# Altium PCB bloodhound_gprs_0_alph.PcbDoc
Units mil, origin at the board's own origin, x right, y up, seen from the top; angles counter-clockwise.
Board outline 1535.43 x 1889.76 mil, 2 copper layers (Top Layer, Bottom Layer); 37 components, 31 nets, 165 pads, 24 vias.
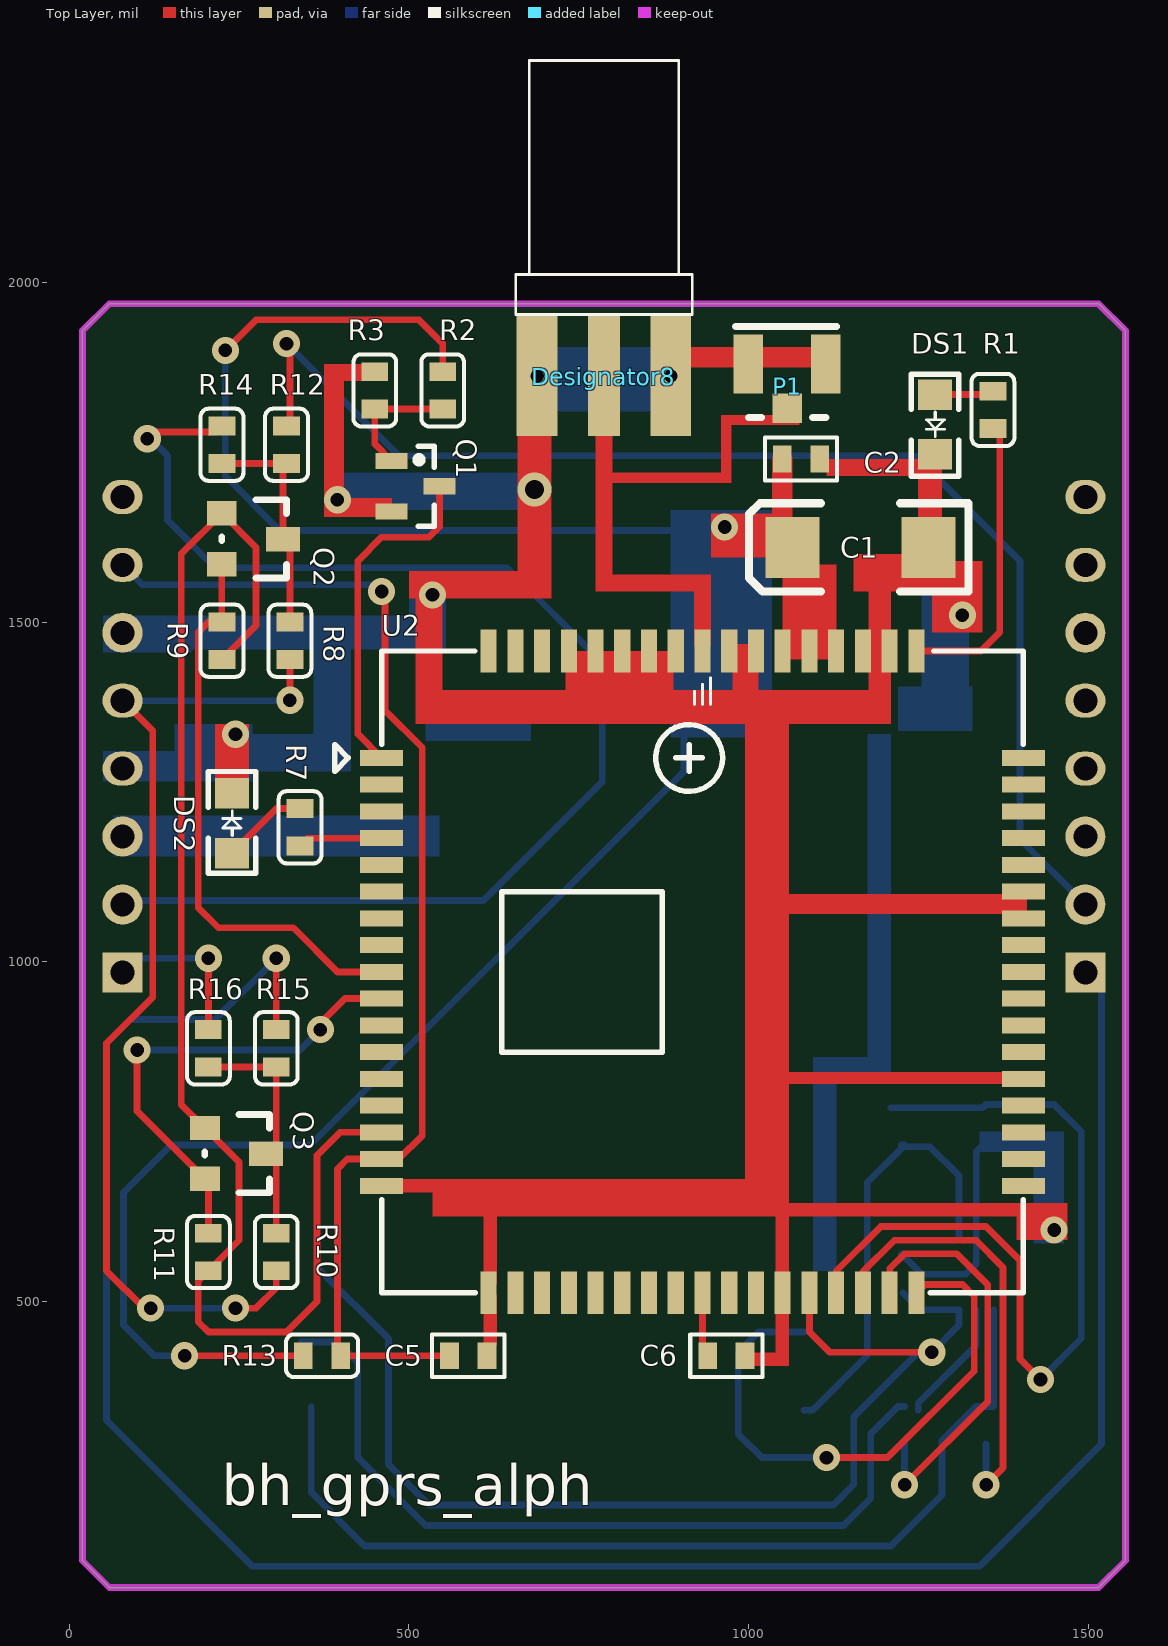
[diagram p0: Top Layer view]
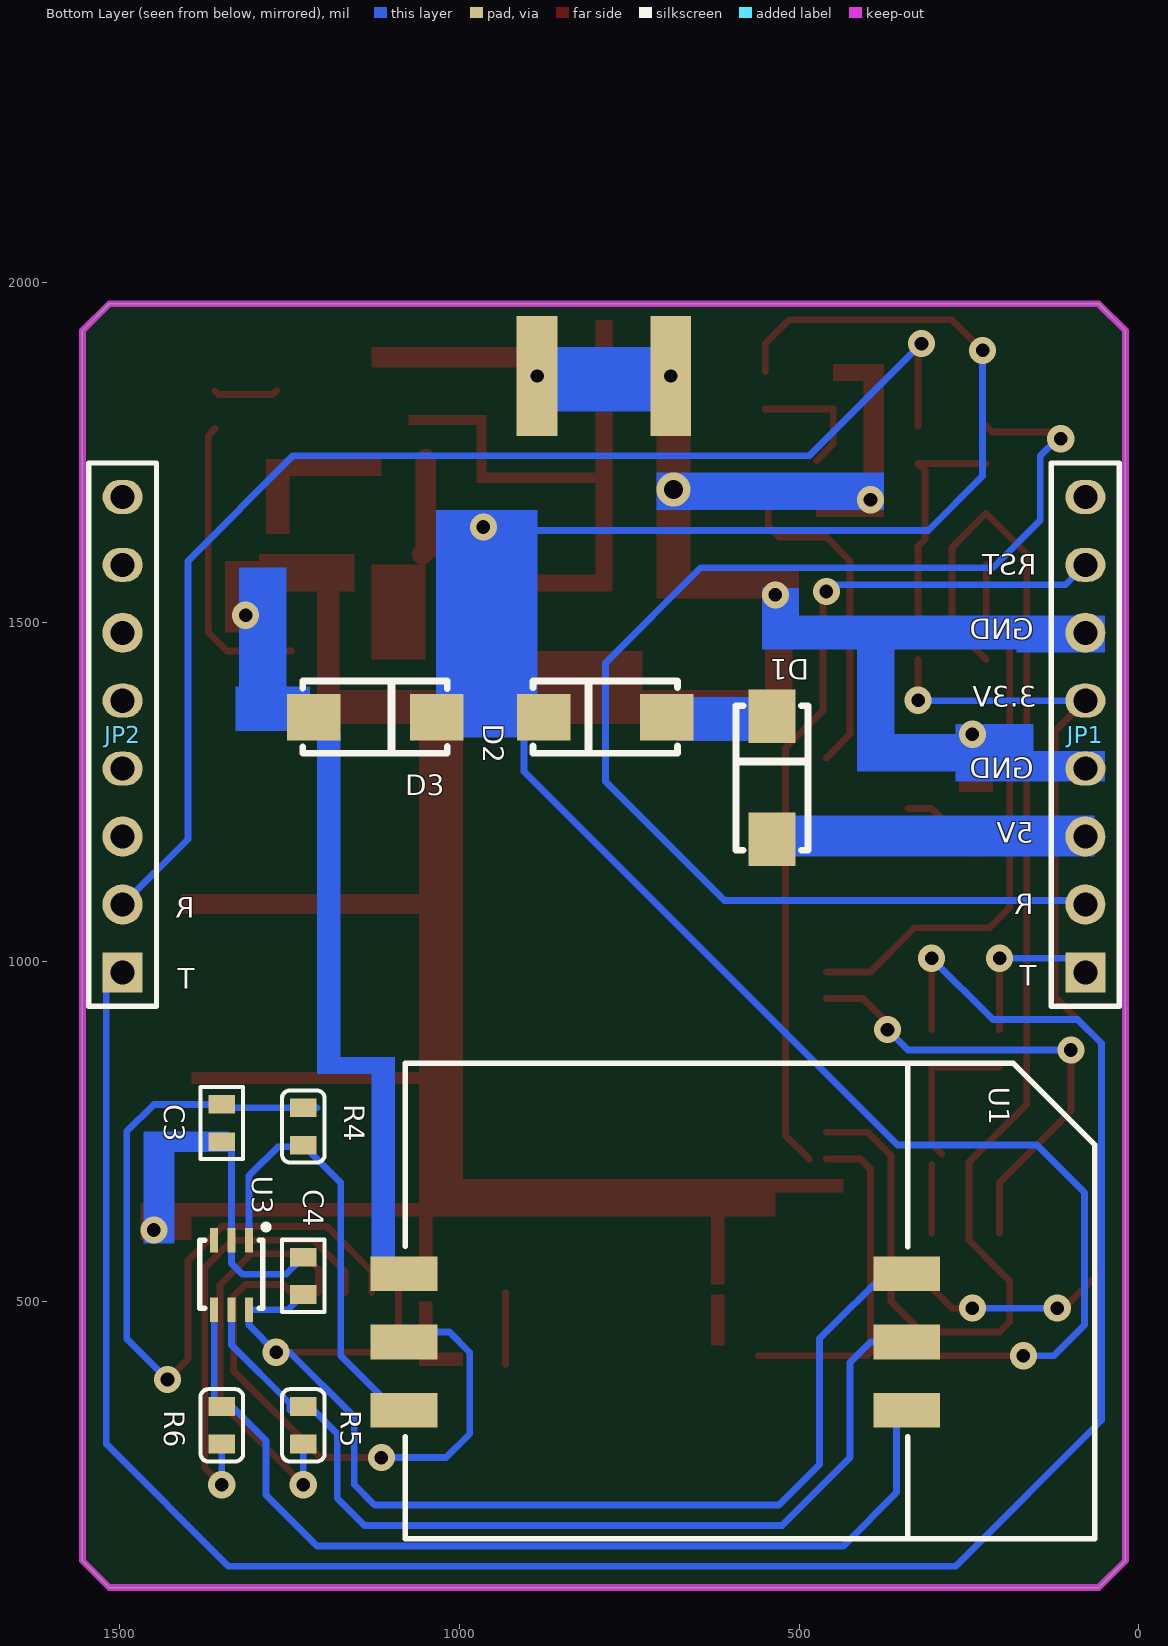
[diagram p1: Bottom Layer view, seen from below]
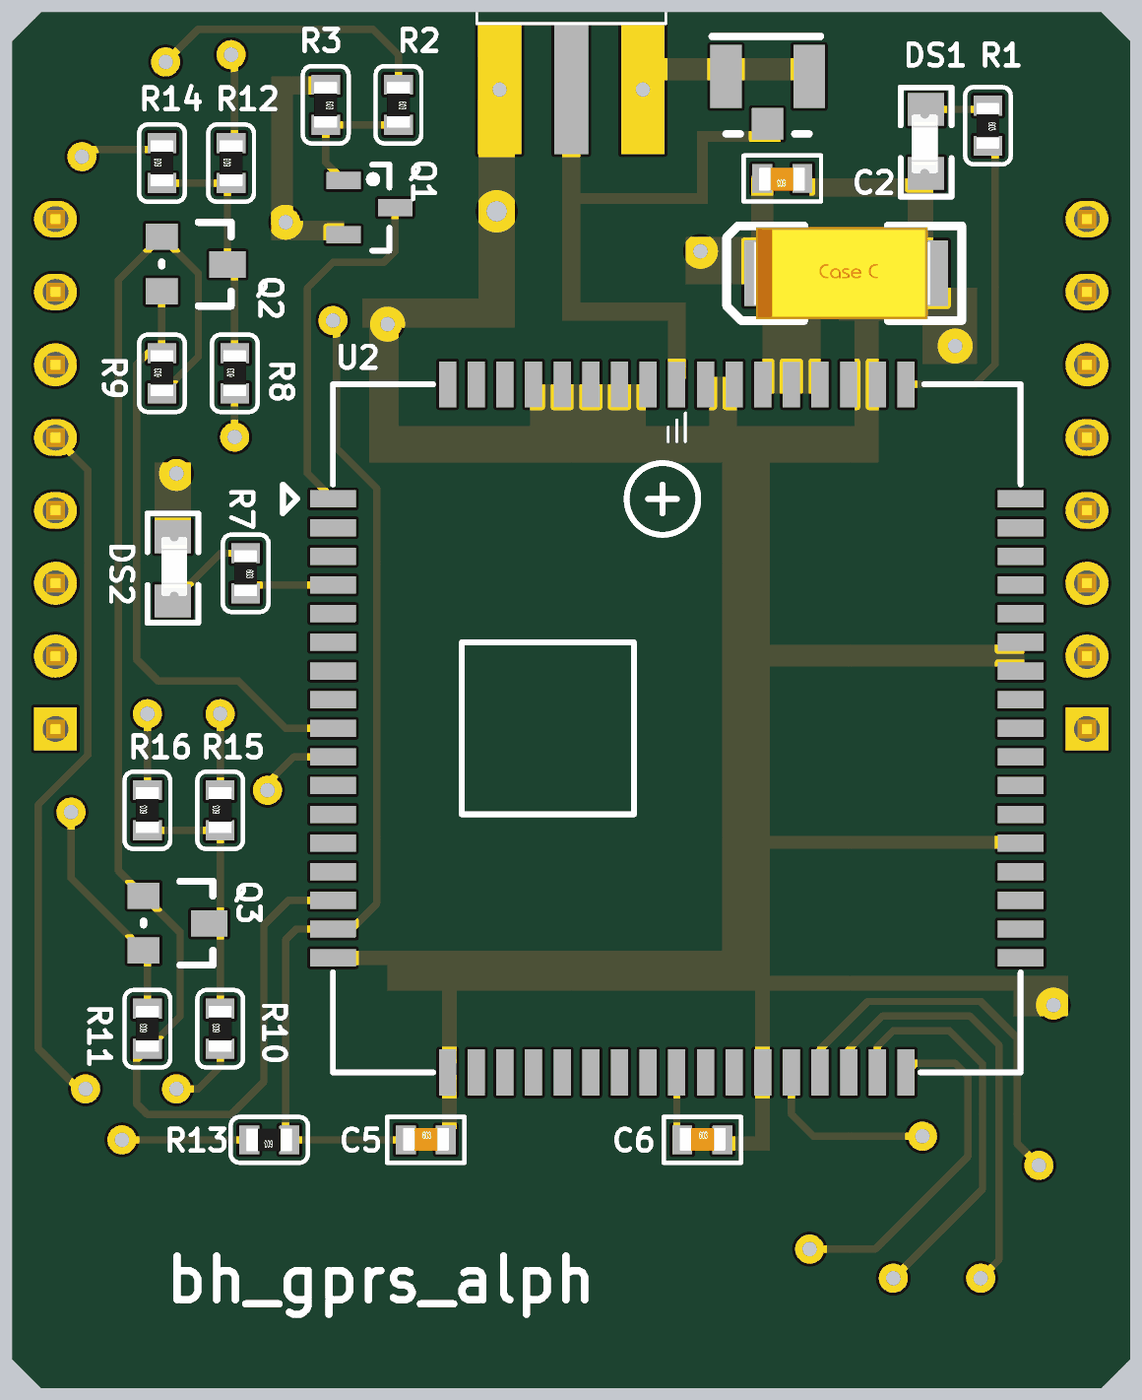
[diagram p2: 3D render of the assembled board from above, using the file's embedded part models]
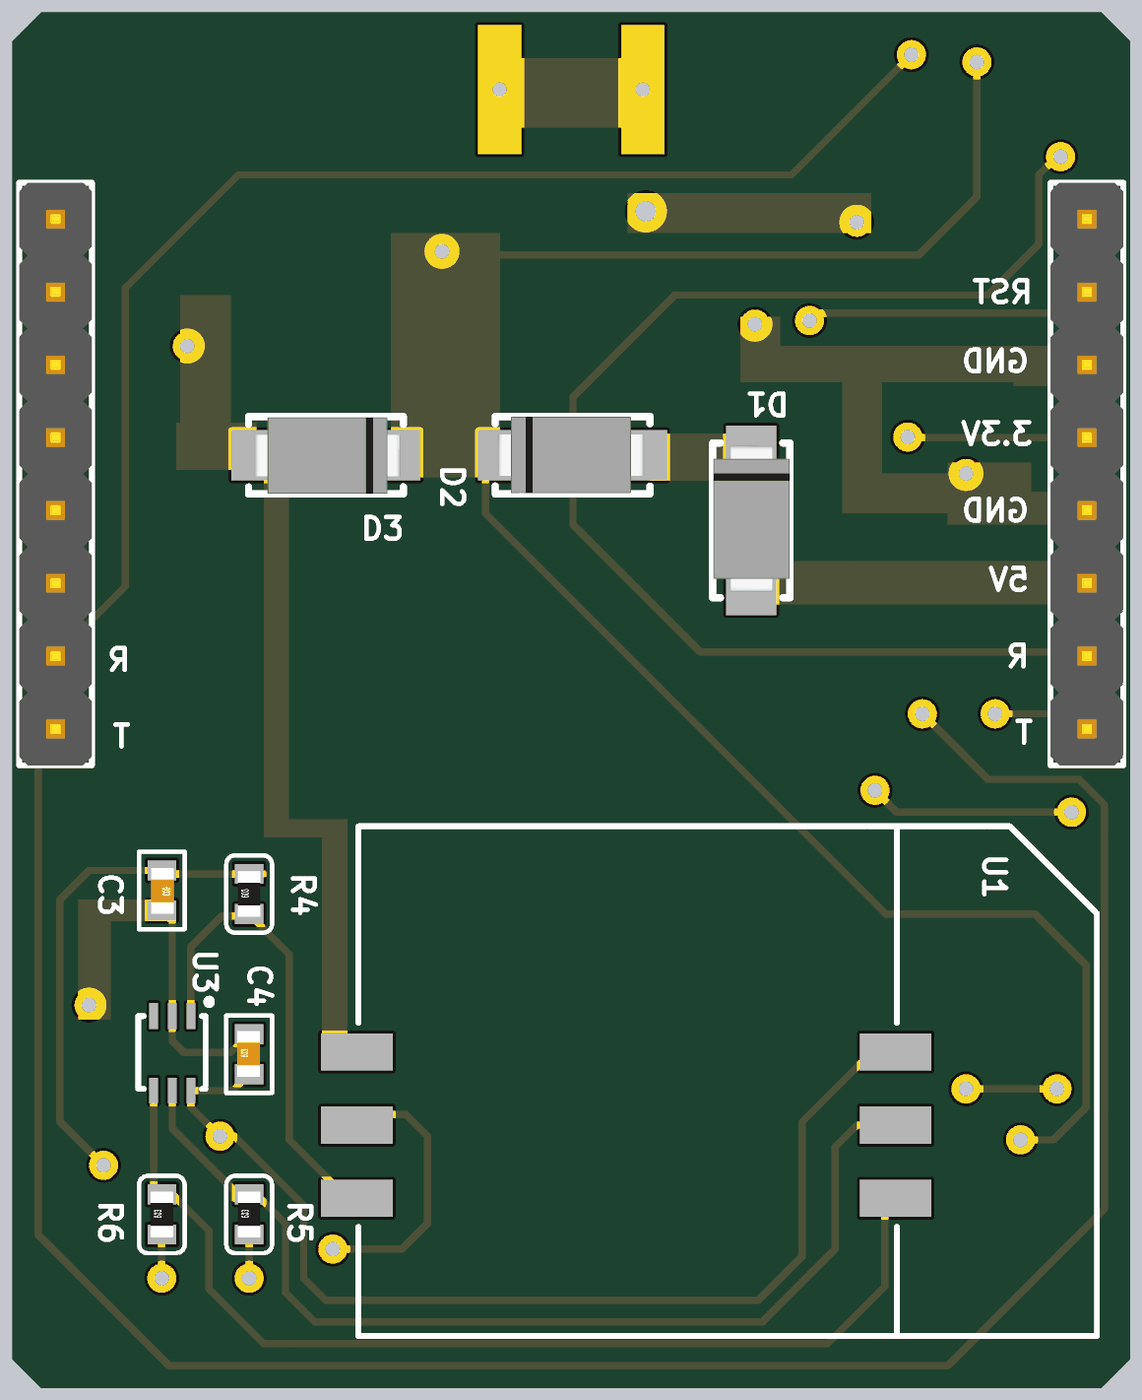
[diagram p3: 3D render of the assembled board from below, using the file's embedded part models]

## Layer stack, top to bottom
Top Layer: signal copper 1.4
Dielectric: dielectric 12.6, FR-4, Dk 4.8
Bottom Layer: signal copper 1.4

## Board outline
59.06,1968.5 1515.75,1968.5 1555.12,1929.13 1555.12,118.11 1515.75,78.74 59.06,78.74 59.05,78.74 19.68,118.11 19.68,1929.13

## Design rules (kind name [scope] priority, off if disabled: settings)
Clearance Clearance_1 [(InPolygon)] p1: gap=20
Clearance [All] p2: gap=10
MinimumSolderMaskSliver [All] p1 off: minsoldermaskwidth=10
PolygonConnect [All] p1: connectstyle=Relief reliefconductorwidth=10 reliefentries=4 polygonreliefangle="90 Angle"
RoutingVias [All] p1: holewidth=20 width=40 viastyle="Through Hole" minholewidth=15 minwidth=30 maxholewidth=28 maxwidth=50
SilkscreenOverComponentPads [All] p1 off: minsilkscreentomaskgap=10
SolderMaskExpansion [All] p1: expansion=4
Width Width_1 [InNet('GND') OR InNet('VCC') OR  InNet('VCC_5V')] p1: maxlimit=30 minlimit=10 preferedwidth=30 minimp=50.000000 maximp=50.000000 favimp=50.000000
Width [All] p2: maxlimit=30 minlimit=10 preferedwidth=10 minimp=50.000000 maximp=50.000000 favimp=50.000000
26 further rules are at their usual default settings.

## Components (designator, comment, footprint, x,y, rotation, side; value= is the part's Value field where it differs from the comment)
C1 "470uf" C6032 1065,1610 r180 top
C2 "0.1uF" C0603 1105,1740 r180 top
C3 "22PF" C0603 1349.99,790 r270 bottom
C4 "0.1uF" C0603 1230,510 r90 bottom
C5 "0.1uF" C0603 560,420 r0 top
C6 "0.1uF" C0603 940,420 r0 top
D1 "SS34" DO-214 540,1180 r90 bottom
D2 "SS34" DO-214 695,1360 r0 bottom
D3 "D-SMBJ5.0CA" DO-214 1215,1360 r180 bottom
Designator8 "Comment" SMA-2 787.4,1862.2 r270 top
DS1 "LED GREEN" D0805 1275,1835 r270 top
DS2 "LED GREEN" D0805 240,1160 r90 top
JP1 "Socket1-A" SIP1X8X2.54 78.74,984.25 r90 bottom
JP2 "Socket1B" SIP1X8X2.54 1496.06,984.25 r90 bottom
P1 "SMA-2" IPX 1000,1880 r0 top
Q1 "9013" SOT23-3L 510,1700 r0 top
Q2 "RTR020P02" TSMT3 225,1659.96 r270 top
Q3 "RTR020P02" TSMT3 200,755 r270 top
R1 "10k" R0603 1360,1840 r270 top
R2 "10k" R0603 550,1868.7 r270 top
R3 "10k" R0603 450,1868.7 r270 top
R4 "22" R0603 1230,730 r90 bottom
R5 "22" R0603 1230,290 r90 bottom
R6 "22" R0603 1350,290 r90 bottom
R7 "1k" R0603 340,1225.46 r270 top
R8 "1k" R0603 325,1445 r90 top
R9 "1k" R0603 225,1445 r90 top
R10 "1k" R0603 305,545 r90 top
R11 "1k" R0603 205,545 r90 top
R12 "0" R0603 320,1733.58 r90 top
R13 "10k" R0603 400,420 r180 top
R14 "0" R0603 225,1733.58 r90 top
R15 "0" R0603 305,845 r90 top
R16 "0" R0603 205,845 r90 top
U1 "SIM" SIM 440,540.63 r90 bottom
U2 "SIM900" GSM_900A 460,1300 r0 top
U3 "SMF05C" SOT-363 1310,590 r270 bottom

## Footprints (in the part's own frame and the unit in brackets; to place one, negate y for a bottom-side part, rotate by r counter-clockwise, add the part's x,y. Pads: shape width x height; smd on the part's side, far side on the other; paste and mask are expansions set on the pad)
C0603 [mm]
  rect 0.7x1 smd: 1(0,0) 2(1.4,0)
  silkscreen extent -0.65,-0.8 2.05,0.8, body extent -0.09,-0.38 1.51,0.42, height 0.3
C6032 [mil]
  rect 79.92x90 smd: 1(0,0) 2(-200,0)
  silkscreen extent -259,-65 64,65, body extent -216,-63 27,63, height 107
D0805 [mil]
  rect 45x50 smd: A(0,0) K(88,0)
  silkscreen extent -30,-35 120,35, body extent 7,-20 88,16, height 33
DO-214 [mm]
  rect 2x1.75 smd: 1(0,0) 2(4.6,0)
  silkscreen extent -0.4,-1.35 5,1.35, body extent -0.2,-1.34 4.91,1.33, height 2.12
GSM_900A [mm]
  rect 1.6x0.6 smd: 1(0,0) 2(0,-1) 3(0,-2) 4(0,-3) 5(0,-4) 6(0,-5) 7(0,-6) 8(0,-7) 9(0,-8) 10(0,-9) 11(0,-10) 12(0,-11) 13(0,-12) 14(0,-13) 15(0,-14) 16(0,-15) 17(0,-16) 35(24,-16) 36(24,-15) 37(24,-14) 38(24,-13) 39(24,-12) 40(24,-11) 41(24,-10) 42(24,-9) 43(24,-8) 44(24,-7) 45(24,-6) 46(24,-5) 47(24,-4) 48(24,-3) 49(24,-2) 50(24,-1) 51(24,0)
  rect 0.6x1.6 smd: 18(4,-20) 19(5,-20) 20(6,-20) 21(7,-20) 22(8,-20) 23(9,-20) 24(10,-20) 25(11,-20) 26(12,-20) 27(13,-20) 28(14,-20) 29(15,-20) 30(16,-20) 31(17,-20) 32(18,-20) 33(19,-20) 34(20,-20) 52(20,4) 53(19,4) 54(18,4) 55(17,4) 56(16,4) 57(15,4) 58(14,4) 59(13,4) 60(12,4) 61(11,4) 62(10,4) 63(9,4) 64(8,4) 65(7,4) 66(6,4) 67(5,4) 68(4,4)
  silkscreen extent -1.75,-20 24,4
IPX [mm]
  rect 1.1x1.1 smd: 1(1.45,-1.65)
  rect 1.1x2.2 smd: 2(0,0) 2(2.9,0)
  silkscreen extent -0.48,-2 3.3,1.4
R0603 [mm]
  rect 0.7x1 smd: 1(0,0) 2(1.4,0)
  silkscreen extent -0.65,-0.8 2.05,0.8, body extent -0.1,-0.4 1.5,0.4, height 0.3
SIM [mm]
  rect 1.3x2.5 smd: 1(0,-2.5) 2(-2.55,-2.5) 3(-5.1,-2.5) 4(0,16.306) 5(-2.55,16.306) 6(-5.1,16.306)
  silkscreen extent -9.91,-9.53 7.87,16.25
SIP1X8X2.54 [mm] "Connector; Header; 8 Position"
  rect 1.5x1.5 hole 0.9: 1(0,0)
  round 1.5 hole 0.9: 2(2.54,0) 3(5.08,0) 6(12.7,0)
  oval 1.27x1.5 hole 0.9: 4(7.62,0) 5(10.16,0) 7(15.24,0) 8(17.78,0)
  silkscreen extent -1.27,-1.27 19.05,1.27, body extent -1.27,-1.27 19.05,1.27, height 0.7
SMA-2 [mm]
  rect 4.5x1.2 smd: 1(0,0)
  rect 4.5x1.524 hole 0.5: 2(0,2.5) 2(0,-2.5)
  silkscreen extent -11.8,-3.3 -2.3,3.3
SOT23-3L [mm] "SOT23, 3-Leads, Body 2.9x1.3mm, Pitch 0.95mm, Lead Span 2.5mm, IPC High Density"
  rect 1.2x0.6 smd: 1(-0.9,0.95) 2(-0.9,-0.95) 3(0.9,0)
  silkscreen extent 0,-1.5 0.7,1.5, body extent -0.7,-1.5 0.7,1.5, height 1.1
SOT-363 [mm]
  rect 0.9x0.3 smd: 1(0,0) 2(0,-0.65) 3(0,-1.3) 4(2.6,-1.3) 5(2.6,-0.65) 6(2.6,0)
  silkscreen extent -0.51,-1.84 2.54,0.64
TSMT3 [mil]
  rect 36x44 smd: 1(-0.24,-0.24) 2(74.76,-0.24)
  rect 36x50 smd: 3(38,90)
  silkscreen extent -20,0 95,95, body extent -24,15 99,69, height 43

## Part data
C1: library part CAP-T, "钽电容"
C2 C3 C4 C5 C6: library part CAP-SMD, "SMD-CAP"
D1 D2: library part DIODE, "Diode"
D3 U3: "TVS"
DS1 DS2: library part LED
JP1 JP2: library part SIP1X8, "2.0排针"
P1: library part BNC, "IPX"
Q1: library part NPN, "NPN Transistor"
Q2 Q3: library part "MOSFET P", "P MOSFET"
R1 R2 R3 R4 R5 R6 R7 R8 R9 R10 R11 R12 R13 R14 R15 R16: library part RES, "Resistor"
U1: "手机SIM卡"

## Via types
v1: diameter 40, hole 20, Top Layer to Bottom Layer, 23 vias
v2: diameter 50, hole 28, Top Layer to Bottom Layer, 1 vias

## Nets (pads, with @x,y where several pads share a name; then routed paths per layer and width w, separated by ;. In a path a pad name is that pad's centre, name@x,y a point inside that pad or via, vN(x,y) a via of type N, cw(c..) or ccw(c..) an arc to the next point about the centre after c; other vN are vias at no path point)
EX_RXD3: JP1.2 R14.2 | length 1966.4
  Top Layer w10: v1@110,1780 216.3,1780 R14.2
  Bottom Layer w10: JP1.2@92.99,1070 JP1.2 84.49,1090 610,1090 785,1265 785,1440 645,1580 215,1580 145,1650 145,1745 v1@110,1780
  other v1: 115,1770
EX_TXD3: JP1.1 R16.2 | length 249.6
  Top Layer w10: R16.2@205,910 R16.2 v1(205,1005)
  Bottom Layer w10: JP1.1 99.49,1005 v1(205,1005)
GND: C1.2 C2.1 C3.2 C4.2 C5.2 C6.2 D3.1 Designator8.2 DS1.K DS2.K JP1.4 JP1.6 P1.2 Q1.2 R3.1 U1.4 U2.17 U2.18 U2.29 U2.39 U2.45 U2.46 U2.53 U2.54 U2.58 U2.59 U2.61 U2.62 U2.63 U2.64 U2.65 U3.2 | length 329.1
  Top Layer w30: Designator8.2@887.4,1889.76 Designator8.2@897.64,1900
  Bottom Layer w10: C4.2@1225.12,570 C4.2 1255.12,540 1320,540 1335.59,555.59 U3.2 1335.59,720.47 C3.2
  other v1: 1450,605 245,1335 1315,1510 535,1540 395,1680
  other v2: 685,1695
NetC6_1: C6.1 U2.26 | length 105
  Top Layer w10: C6.1@932.44,407.56 U2.26
NetD1_2: D1.2 D2.1
NetDS1_A: DS1.A R1.1 | length 94.8
  Top Layer w10: DS1.A@1269.54,1840.46 DS1.A 1355,1835 R1.1
NetDS2_A: DS2.A R7.1 | length 127.1
  Top Layer w10: DS2.A 305.46,1225.46 R7.1
NetP1_2: Designator8.1 P1.1 U2.60
NetQ1_B: Q1.1 R2.2 R3.2 | length 187.1
  Top Layer w10: Q1.1 450,1761.97 R3.2 R2.2 R2.2@550,1812.83
NetQ2_2: Q2.2 R9.2 U2.9 | length 840.4
  Top Layer w10: Q2.2 224.76,1500.35 205.35,1500.35 190,1485 190,1080 220,1050 330.04,1050 395,985.04 420,985.04 419.96,985 U2.9 U2.9
NetQ3_2: Q3.2 R11.2 U2.10 | length 722
  Top Layer w10: v1(100,870) 100,860 95,855 100,850 100,780 Q3.2 205,675 R11.2 ; v1@370,909.58 406.09,945.67 U2.10
  Bottom Layer w10: v1@95,855 100,860 v1(100,870) 340,870 v1(370,900)
NetR1_2: R1.2 U2.52 | length 438
  Top Layer w10: U2.52 1342.48,1457.48 1370,1485 1370,1774.88 R1.2
NetR4_1: R4.1 U1.6 U3.1 | length 662.7
  Bottom Layer w10: U1.6 1094.84,339.84 1175,420 1175,675 R4.1@1227.5,727.5 ; U3.1 1310,685 1267.5,727.5 R4.1@1227.5,727.5 ; R4.1@1227.5,727.5 R4.1 1225,730 R4.1@1227.5,727.5
NetR5_2: R5.2 U1.2 U3.5 | length 1393.6
  Bottom Layer w10: U1.2 394.76,440.24 425,410 425,270 525,170 1140,170 1180,210 1180,305 1220.12,345.12 R5.2 ; 1250,340 1250,350 1335.59,435.59 U3.5
NetR6_2: R6.2 U1.3 U3.4 | length 1437.3
  Bottom Layer w10: U1.3@356.57,345 356.57,218.43 435,140 1210,140 1285,215 1285,295 1335.12,345.12 R6.2 1360,345.12 1361.18,346.3 U3.4
NetR7_2: R7.2 U2.4 | length 127.6
  Top Layer w10: R7.2 351.55,1181.89 U2.4 U2.4@457.99,1179.88
PWRKEY: Q1.3 U2.1 | length 505.4
  Top Layer w10: U2.1 425,1335 425,1590 460,1625 530,1625 545.43,1640.43 Q1.3
RXD0: JP2.2 R12.2 | length 1878.5
  Top Layer w10: R12.2@325,1788.7 v1@325,1895
  Bottom Layer w10: v1@330,1900 v1(320,1910) 485,1745 1245,1745 1400,1590 1400,1180.31 JP2.2
SIM900_RST: C5.1 JP1.7 R13.1 U2.16 | length 1806.3
  Top Layer w10: U2.16 409.45,709.45 395,695 395,425 R13.1 C5.1 ; v1(460,1545) 460,1555 465,1550 465,1370 520,1315 520,744.3 U2.16@485.15,709.45
  Bottom Layer w10: JP1.7 107.99,1555 460,1555 v1(460,1545)
SIM_CLK: R6.1 U2.32 | length 663.5
  Top Layer w10: U2.32 1168.66,543.66 1215,590 1335,590 1375,550 1375,255 v1(1350,230)
  Bottom Layer w10: v1(1350,230) R6.1
SIM_DATA: C3.1 R4.2 U2.31 | length 1226.2
  Top Layer w10: U2.31 1129.29,544.29 1195,610 1350,610 1400,560 1400,415 v1(1430,385)
  Bottom Layer w10: 1210,785.12 R4.2 1345.11,785.12 C3.1 1450,790 1490,750 1490,445 v1(1430,385)
SIM_RST: R5.1 U2.33 | length 613
  Top Layer w10: U2.33 1208.03,548.03 1230,570 1306.85,570 1352.5,524.35 1352.5,352.5 v1(1230,230)
  Bottom Layer w10: v1(1230,230) R5.1
SIM_RX: Q3.3 R10.2 R15.1 R16.1 | length 336.1
  Top Layer w10: R16.1 R15.1 305,732 Q3.3 ; R10.2 Q3.3@305,702
SIM_TX: Q2.3 R8.2 R12.1 R14.1 | length 341.7
  Top Layer w10: R14.1 325,1733.58 315,1723.58 Q2.3 325,1611.96 R8.2
SIM_VDD: C4.1 U1.1 U2.30 U3.6 | length 1730
  Top Layer w10: U2.30 1089.92,455.08 1120,425 v1(1270,425)
  Bottom Layer w10: U1.1@366.57,548.43 470,445 470,260 530,200 1125,200 1155,230 1155,330 1250,425 v1(1270,425) 1310,465 U3.6 1252.36,487.64 C4.1 C4.1@1227.5,512.5
SIM_VPP: U1.5 U2.34 | length 851.7
  Top Layer w10: v1(1115,270) 1205,270 1332.5,397.5 1332.5,507.5 1315,525 1259.8,525 U2.34
  Bottom Layer w10: U1.5@1081.97,455 1015,455 985,425 985,305 1020,270 v1(1115,270)
TXD0: JP2.1 R15.2 | length 3294.4
  Top Layer w10: R15.2 v1(305,1005)
  Bottom Layer w10: v1(305,1005) 215,915 90,915 55,880 55,325 270,110 1340,110 1520,290 1520,960.31 JP2.1
VCC: C1.1 C2.2 D2.2 D3.2 R2.1 R13.2 U2.55 U2.56 U2.57 | length 3474
  Top Layer w10: v1(170,420) R13.2 ; v1(230,1900) 275,1945 515,1945 550,1910 R2.1 R2.1@550,1880
  Top Layer w30: C2.2 1049.88,1605.12 C1.1@1055,1600
  Bottom Layer w10: v1(170,420) 125,420 80,465 80,660 150,730 355,730 905,1280 905,1520 965,1580 ; v1(230,1900) 230,1715 310,1635 910,1635 965,1580 ; 960,1580 965,1580 ; v1(965,1640) 965,1580
VCC_3.3V: JP1.5 R8.1 R10.1 | length 1502.8
  Top Layer w10: JP1.5 123.27,1339.72 123.27,948.27 55,880 55,545 110,490 v1(120,490) ; v1(245,490) 275,490 305,520 R10.1 ; v1(325,1385) R8.1
  Bottom Layer w10: JP1.5 324.25,1384.25 v1(325,1385) ; v1(120,490) v1(245,490)
VCC_5V: D1.1 JP1.3
VDD_EXT: Q2.1 Q3.1 R9.1 R11.1 U2.15 | length 2055.6
  Top Layer w10: R9.1 275,1495 275,1609.96 Q2.1 165,1600.43 165,790 Q3.1 250,705 250,590 R11.1 190,530 190,470 205,455 320,455 365,500 365,715 398.82,748.82 U2.15
pads on no net: JP1.8 JP2.3 JP2.4 JP2.5 JP2.6 JP2.7 JP2.8 U2.2 U2.3 U2.5 U2.6 U2.7 U2.8 U2.11 U2.12 U2.13 U2.14 U2.19 U2.20 U2.21 U2.22 U2.23 U2.24 U2.25 U2.27 U2.28 U2.35 U2.36 U2.37 U2.38 U2.40 U2.41 U2.42 U2.43 U2.44 U2.47 U2.48 U2.49 U2.50 U2.51 U2.66 U2.67 U2.68 U3.3

## Keep-outs
Keep-Out Layer:
  the board outline again, w10

## Other copper
Top Layer:
  rectangle net GND: 1395,590 1470,645
  rectangle net GND: 1045,625 1420,645
  rectangle net GND: 1040,415 1060,500
  rectangle net GND: 390.43,1655 475,1682.4
  rectangle net GND: 375,1855 450,1880
  rectangle net GND: 375,1655 405,1880
  rectangle net GND: 1270,1485 1345,1590
  rectangle net GND: 660,1540 710,1860
  rectangle net GND: 500,1535 710,1575
  rectangle net GND: 510,1350 550,1575
  rectangle net VCC: 1050,1445 1130,1585
  rectangle net GND: 976.81,1395 1015,1467.52
  rectangle net GND: 1176.97,1390 1210,1600
  region net GND: 1410,1100 1010,1100 1010,1070 1410,1070
  rectangle net GND: 1014.88,820 1395,837.44
  rectangle net GND: 1155,1545 1295,1600
  rectangle net GND: 730.59,1400 890,1457.48
  rectangle net GND: 510,1350 1210,1400
  rectangle net GND: 995,645 1060,1360
  rectangle net GND: 535,625 1060,680
  rectangle net GND: 610,525 630,665
  rectangle net GND: 1040,535 1060,690
  rectangle net GND: 1115,1715 1285,1740
  rectangle net GND: 1250,1630 1285,1730
  rectangle net GND: 435,660 575,680
  rectangle net GND: 995,405 1060,425
  region net GND: 630,435 630,510 610,510 610,435
  rectangle net VCC: 945,1595 1045,1660
  region net GND: 265,1250 265,1350 215,1350 215,1250
  rectangle net NetP1_2: 920,1465 945,1560
  rectangle net NetP1_2: 775,1545 945,1570
  rectangle net NetP1_2: 775,1545 800,1945
  region net GND: 1130,1875 1130,1905 887.4,1905 887.4,1875
  rectangle net NetP1_2: 785,1705 975,1720
  rectangle net NetP1_2: 960,1705 975,1805
  rectangle net NetP1_2: 960,1790 1075,1805
Bottom Layer:
  rectangle net GND: 1340,720 1465,750
  rectangle net GND: 1420,585 1465,745
  rectangle net GND: 1095,835 1210,860
  rectangle net GND: 1095,545 1130,860
  rectangle net GND: 1175,840 1210,1335
  rectangle net GND: 375,1665 710,1720
  rectangle net GND: 1255,1385 1325,1580
  rectangle net GND: 500,1460 555,1550
  rectangle net GND: 155,1460 525,1510
  rectangle net GND: 50,1265 175,1310
  rectangle net GND: 50,1455 180,1510
  rectangle net GND: 1220,1340 1330,1405
  rectangle net VCC: 885,1330 1035,1665
  rectangle net NetD1_2: 525,1325 680,1390
  rectangle net VCC_5V: 65,1155 545,1215
  rectangle net GND: 155,1265 270,1350
  rectangle net GND: 235,1280 415,1335
  rectangle net GND: 360,1315 415,1495
  rectangle net GND: 680,1810 895,1905

## Silkscreen, mask and mechanical layers (free items; w line width, h text height)
Top Overlay:
  text "bh_gprs_alph" at 225,200 h60
Bottom Overlay:
  text "RST" at 150,1570 h30
  text "GND" at 155,1475 h30
  text "3.3V" at 150,1375 h30
  text "GND" at 155,1270 h30
  text "5V" at 155,1175 h30
  text "R" at 155,1070 h30
  text "R" at 1390,1065 h30
  text "T" at 150,965 h30
  text "T" at 1390,960 h30